# Altium PCB TLE5012_V1.2.PcbDoc
Units mil, origin at the board's own origin, x right, y up, seen from the top; angles counter-clockwise.
Board outline 878.69 x 787.25 mil, 2 copper layers (Top Layer, Bottom Layer); 10 components, 12 nets, 40 pads, 48 vias.
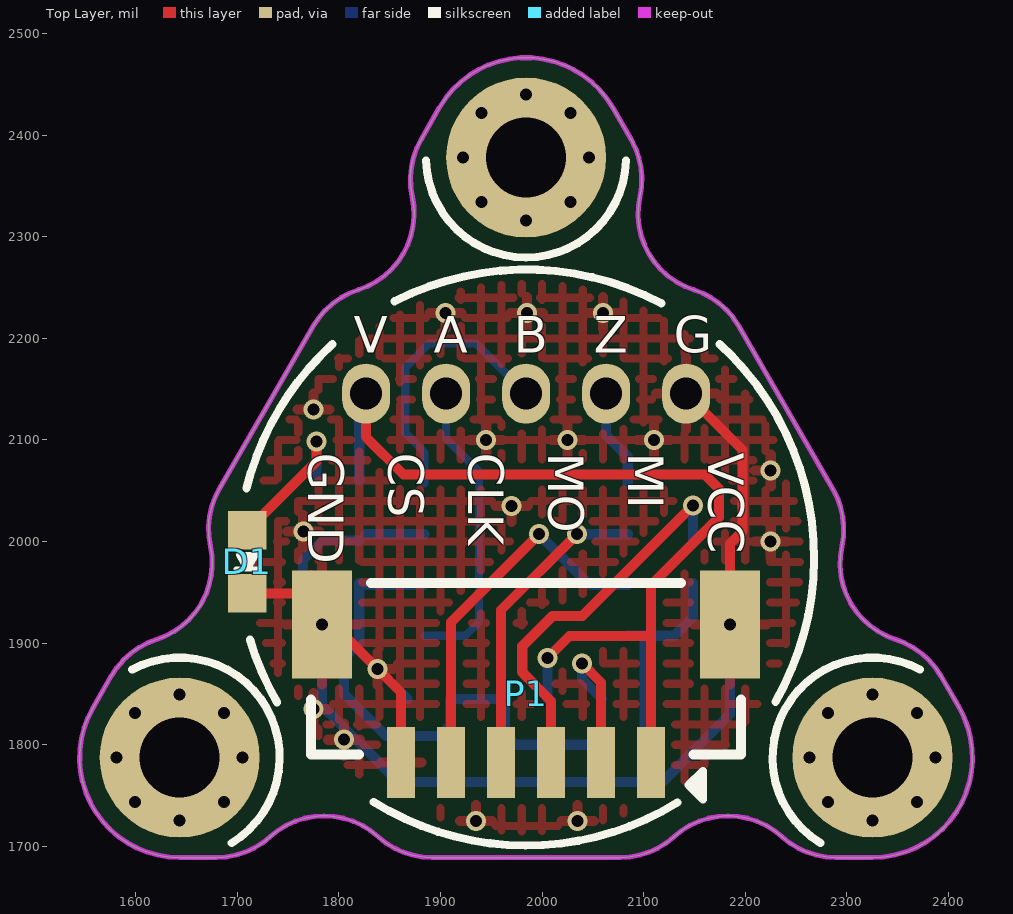
[diagram p0: Top Layer view]
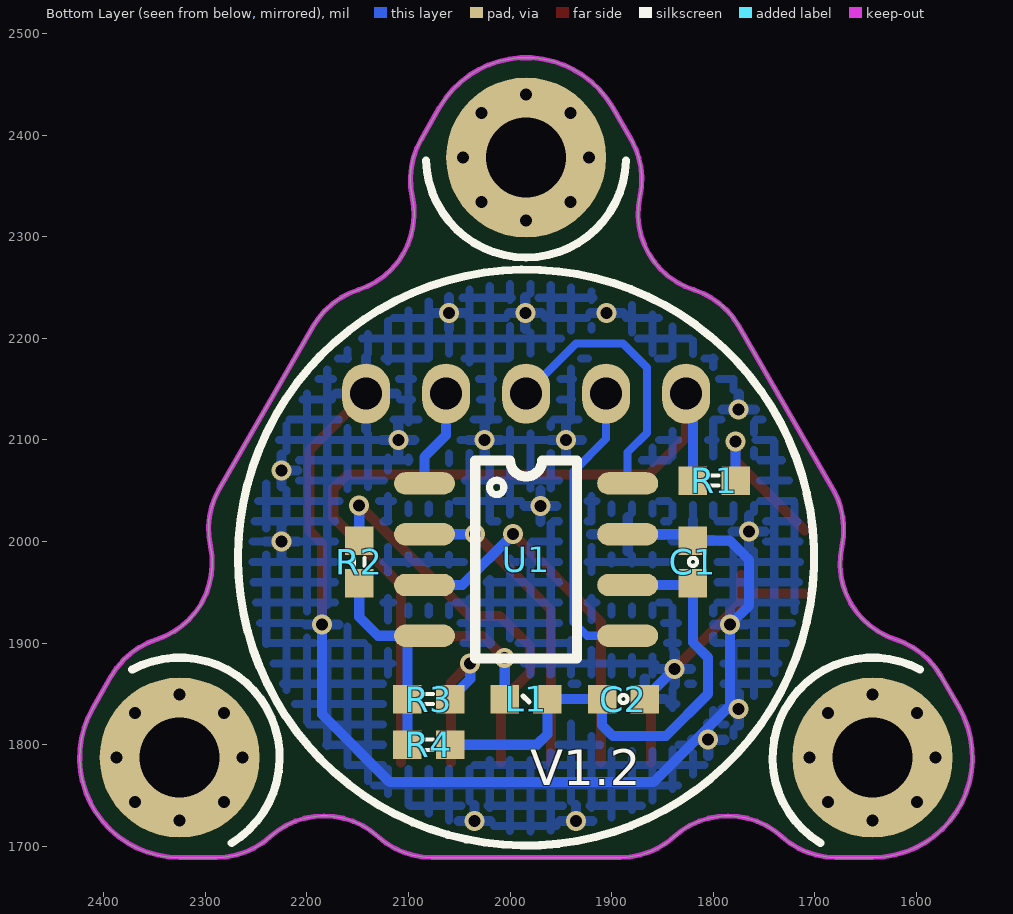
[diagram p1: Bottom Layer view, seen from below]

## Layer stack, top to bottom
Top Layer: signal copper 1.4
Dielectric: dielectric 12.6, FR-4, Dk 4.8
Bottom Layer: signal copper 1.4

## Board outline
1643.3,1688.98 1679.46,1688.98 ccw(c1679.46,1767.72) 1732.49,1709.51 cw(c1785.52,1651.3) 1838.55,1709.51 ccw(c1891.58,1767.72) 1891.58,1688.98 2076.93,1688.98 ccw(c2076.93,1767.72) 2129.96,1709.51 cw(c2182.99,1651.3) 2236.01,1709.51 ccw(c2289.04,1767.72) 2289.04,1688.98 2325.21,1688.98 ccw(c2325.21,1787.4) 2410.45,1836.61 2392.36,1867.94 ccw(c2324.17,1828.57) 2348.07,1903.59 cw(c2371.96,1978.62) 2295.04,1995.44 ccw(c2218.12,2012.26) 2286.31,2051.63 2193.63,2212.15 ccw(c2125.44,2172.78) 2149.33,2247.81 cw(c2173.23,2322.84) 2096.31,2339.66 ccw(c2019.38,2356.47) 2087.57,2395.85 2069.49,2427.17 ccw(c1984.25,2377.95) 1899.01,2427.17 1880.93,2395.85 ccw(c1949.12,2356.47) 1872.2,2339.66 cw(c1795.28,2322.84) 1819.17,2247.81 ccw(c1843.07,2172.78) 1774.88,2212.15 1682.2,2051.63 ccw(c1750.39,2012.26) 1673.47,1995.44 cw(c1596.54,1978.62) 1620.44,1903.59 ccw(c1644.33,1828.57) 1576.14,1867.94 1558.06,1836.61 ccw(c1643.3,1787.4)

## Design rules (kind name [scope] priority, off if disabled: settings)
Clearance [All] p1: gap=6
ComponentClearance [All] p1: gap=0 collisioncheckmode=3 verticalgap=0 showdistances=FALSE
PolygonConnect [All] p1: connectstyle=Relief reliefconductorwidth=10 reliefentries=4 polygonreliefangle="90 Angle"
RoutingVias [All] p1: holewidth=28 width=50 viastyle="Through Hole" minholewidth=7.87 minwidth=10.63 maxholewidth=382.33 maxwidth=404.33
SilkToSilkClearance [All] p1: silktosilkclearance=0
SilkscreenOverComponentPads [All] p1: minsilkscreentomaskgap=0
SolderMaskExpansion [All] p1: expansion=4
Width [All] p1: maxlimit=100 minlimit=6 preferedwidth=10
25 further rules are at their usual default settings.

## Components (designator, comment, footprint, x,y, rotation, side; value= is the part's Value field where it differs from the comment)
C1 "100nF/50V" 0402_C 1820,1980 r90 bottom locked
C2 "2.2uF" 0402_C 1888.51,1845 r180 bottom locked
D1 "0603_D-CL-0603 URC-RED" 0603_D 1710,1980 r90 top
L1 "1000R-350mA" 0402_L 1984.25,1845 r180 bottom locked
P1 "CON" BM06B-GHS-TBT(TOP) 1984.25,1850.39 r0 top locked
R1 "10K" 0402_R 1799,2060 r0 bottom
R2 "10R" 0402_R 2148.51,1980 r270 bottom locked
R3 "10R" 0402_R 2080,1845 r0 bottom locked
R4 "2.2K" 0402_R 2080,1800 r180 bottom
U1 "TLE5012" SOP-8 1984.25,1984.25 r270 bottom locked

## Footprints (in the part's own frame and the unit in brackets; to place one, negate y for a bottom-side part, rotate by r counter-clockwise, add the part's x,y. Pads: shape width x height; smd on the part's side, far side on the other; paste and mask are expansions set on the pad)
0402_C [mil]
  rect 28x28 smd: 1(-21,0) 2(21,0)
  silkscreen extent -4,-4 4,4
0402_L [mil]
  rect 28x28 smd: 1(-21,0) 2(21,0)
  silkscreen extent -3,-3 3,3
0402_R [mil]
  rect 28x28 smd: 1(-21,0) 2(21,0)
  silkscreen extent -4,-5 4,5
0603_D [mil]
  rect 38x38 smd: 1(31,0) 2(-31,0)
  silkscreen extent -7,-11 7,11
BM06B-GHS-TBT(TOP) [mm]
  rect 0.7x1.778 smd: 1(3.125,-1.725) 2(1.875,-1.725) 3(0.625,-1.725) 4(-0.625,-1.725) 5(-1.875,-1.725) 6(-3.125,-1.725)
  rect 1.5x2.7 smd: 7(-5.1,1.725) 8(5.1,1.725)
  silkscreen extent -5.37,-2.64 5.37,2.77
SOP-8 [mil]
  oval 22x60 smd: 1(-73,-100) 2(-23,-100) 3(27,-100) 4(77,-100) 5(77,100) 6(27,100) 7(-23,100) 8(-73,100)
  silkscreen extent -96,-50 100,50

## Part data
C1 C2: library part Cap, "Capacitor"
D1: library part LED, "LED"
L1: library part Inductor, "Inductor"
P1: library part CON-6
R1 R2 R3 R4: library part Res2, "Resistor"

## Free pads (board coordinates)
  oval 47.24x59.06 hole 31.5: 0(1826.77,2145.67)
  oval 47.24x59.05 hole 31.5: 0(1905.51,2145.67) 0(1984.25,2145.67) 0(2062.99,2145.67) 0(2141.73,2145.67)
  round 157.48 hole 78.74: 0(1984.25,2377.95) 1(2325.21,1787.4) 2(1643.3,1787.4)

## Via types
v1: diameter 19.68, hole 11.81, Top Layer to Bottom Layer, tented both sides, 48 vias

## Nets (pads, with @x,y where several pads share a name; then routed paths per layer and width w, separated by ;. In a path a pad name is that pad's centre, name@x,y a point inside that pad or via, vN(x,y) a via of type N, cw(c..) or ccw(c..) an arc to the next point about the centre after c; other vN are vias at no path point)
A: pad.0@1905.51,2145.67 U1.5 | length 297.5
  Bottom Layer w8: U1.5 1924.4,1907.25 1937.76,1920.62 1937.76,2068.9 1905.51,2101.14 pad.0@1905.51,2145.67
B: pad.0@1984.25,2145.67 U1.8 | length 270.8
  Bottom Layer w8: U1.8 1884.25,2087.9 1865.38,2106.77 1865.38,2171.33 1888.84,2194.79 1935.13,2194.79 pad.0@1984.25,2145.67
CS: P1.5 U1.3 | length 368.6
  Top Layer w10: P1.5 1910.43,1920.66 v1(1997.03,2007.25)
  Bottom Layer w10: v1(1997.03,2007.25) 2047.03,1957.25 U1.3
GND: C1.2 C2.2 D1.2 P1.6 P1.7 P1.8 pad.0@2141.73,2145.67 U1.7 | length 1402.3
  Top Layer w10: D1.2 1771.96,1949 P1.7@1772.43,1949.47 ; P1.7@1772.43,1967 1772.43,1940.2 v1(1837.95,1874.68) 1861.22,1851.41 P1.6 ; pad.0@2141.73,2145.67 2197.28,2090.12 2197.28,2010.34 2185.04,1998.09 v1(2185.04,1918.31)
  Bottom Layer w10: C1.2 1783.94,2001 1764.75,1981.81 1764.75,1937.02 v1(1783.47,1918.31) 1783.47,1838.54 1858.79,1763.22 2118.29,1763.22 2185.04,1829.96 v1(2185.04,1918.31) ; C1.2@1826.25,2007.25 U1.7 ; v1(1837.95,1874.68) 1867.51,1845.12 C2.2
  other v1: 1935,1725 2035,1725 1805,1805 1775,1835 2225,2000 1765,2010 1970,2035 2225,2070 1945,2100 2025,2100 2110,2100 1775,2130 1905,2225 1985,2225 2060,2225
MISO: P1.2 R3.1 | length 148.6
  Top Layer w10: v1(2039.28,1880.07) 2058.07,1861.28 P1.2
  Bottom Layer w10: v1(2039.28,1880.07) 2039.28,1864.72 R3.1
MOSI: P1.3 R2.1 | length 386.3
  Top Layer w10: P1.3 2008.86,1843.06 1980.45,1871.47 1980.45,1896.9 2010.42,1926.87 2039.77,1926.87 v1(2148.51,2035.61)
  Bottom Layer w10: R2.1 v1(2148.51,2035.61)
NetC1_1: C1.1 C2.1 L1.2 R4.2 U1.6 | length 517.7
  Bottom Layer w10: C1.1 1820,1900.66 1805.11,1885.77 1805.11,1850.06 1846.56,1808.6 1898.81,1808.6 1909.51,1819.3 C2.1 L1.2 1963.25,1810.39 1973.65,1800 R4.2 ; C1.1@1821.75,1957.25 U1.6
NetD1_1: D1.1 R1.1 | length 153.8
  Top Layer w10: D1.1 1778,2079 v1(1778,2098.34)
  Bottom Layer w10: R1.1 v1(1778,2098.34)
NetR2_2: R2.2 R3.2 R4.1 U1.4 | length 211.3
  Bottom Layer w10: U1.4 2130.01,1907.25 2148.51,1925.75 R2.2 ; R4.1 U1.4@2101,1906.15
SCK: P1.4 U1.2 | length 305.6
  Top Layer w10: P1.4 1959.65,1932.57 v1(2034.33,2007.25)
  Bottom Layer w10: v1(2034.33,2007.25) U1.2
VCC: L1.1 P1.1 pad.0@1826.77,2145.67 R1.2 | length 948.3
  Top Layer w10: pad.0@1826.77,2145.67 1826.77,2102.78 1863.53,2066.03 2160.07,2066.03 2174.13,2051.97 2174.13,2023.91 2107.28,1957.07 P1.1 ; v1(2005.25,1885.34) 2027.03,1907.12 2107.28,1907.12
  Bottom Layer w10: R1.2 1820,2138.9 pad.0@1826.77,2145.67 ; L1.1 v1(2005.25,1885.34)
Z: pad.0@2062.99,2145.67 U1.1 | length 97.2
  Bottom Layer w10: pad.0@2062.99,2145.67 2062.99,2104.64 2084.25,2083.38 U1.1
copper on no net:
  other v1: 1643.3,1725.36 2325.21,1725.36 1599.42,1743.53 1687.17,1743.53 2281.33,1743.53 2369.08,1743.53 1581.25,1787.4 1705.34,1787.4 2263.16,1787.4 2387.25,1787.4 1599.42,1831.28 1687.17,1831.28 2281.33,1831.28 2369.08,1831.28 1643.3,1849.45 2325.21,1849.45 1984.25,2315.91 1940.38,2334.08 2028.13,2334.08 1922.21,2377.95 2046.3,2377.95 1940.38,2421.83 2028.13,2421.83 1984.25,2440

## Polygon pours and split planes (outlines as drawn)
GND on Top Layer "Top Layer-No Net" (hatched 90Degree grid 20 track 8, remove dead copper, pour order 1000): 1499.78,1690.75 1497.09,1693.44 1497.09,2124 1497.09,2132.97 1863.96,2499.84 1867.55,2496.25 2118.7,2496.25 2128.57,2496.25 2445.21,2179.61 2458.67,2166.16 2458.67,1675.5 2458.67,1672.81 2436.24,1650.38 2429.96,1644.1 1552.7,1644.1 1546.42,1644.1 1499.78,1690.75
GND on Bottom Layer "Top Layer-No Net" (hatched 90Degree grid 20 track 8, remove dead copper, pour order 1001): 1499.78,1700.44 1497.09,1703.13 1497.09,2133.69 1497.09,2142.66 1863.96,2509.53 1867.55,2505.95 2118.7,2505.95 2128.57,2505.95 2445.21,2189.31 2458.67,2175.85 2458.67,1685.19 2458.67,1682.5 2436.24,1660.08 2429.96,1653.8 1552.7,1653.8 1546.42,1653.8 1499.78,1700.44

## Keep-outs
Keep-Out Layer:
  the board outline again, w5

## Silkscreen, mask and mechanical layers (free items; w line width, h text height)
Top Overlay:
  lines w8: 1596.38,1873.92 cw(c1643.3,1787.4) 1694.51,1703.35 ; 1709.11,2052.41 cw(c1984.25,1984.25) 1793.82,2194.22 ; 1712.5,1903.6 ccw(c1984.25,1984.25) 1739.26,1841.66 ; 1834.22,1743.75 ccw(c1984.25,1984.25) 2133.13,1743.03 ; 1854.89,2236.48 cw(c1984.25,1984.25) 2117.35,2234.53 ; 1885.87,2375.17 ccw(c1984.25,2377.95) 2082.64,2375.07 ; 2174.68,2194.22 cw(c1984.25,1984.25) 2229.63,1842.32 ; 2273.99,1703.35 cw(c2325.21,1787.4) 2372.13,1873.92
  text "V" at 1814.78,2185.9 h36
  text "A" at 1893.52,2185.9 h36
  text "B" at 1972.26,2185.9 h36
  text "Z" at 2051,2185.9 h36
  text "G" at 2129.74,2185.9 h36
  text "GND" at 1770,2087.27 h35 r270
  text "CS" at 1848.74,2087.27 h35 r270
  text "CLK" at 1927.48,2087.27 h35 r270
  text "MO" at 2006.22,2087.27 h35 r270
  text "MI" at 2084.96,2087.27 h35 r270
  text "VCC" at 2163.7,2087.27 h35 r270
Bottom Overlay:
  circle w8: c1984.25,1984.25 r283.46
  lines w8: 1596.38,1873.92 cw(c1643.3,1787.4) 1694.51,1703.35 ; 1885.87,2375.17 ccw(c1984.25,2377.95) 2082.64,2375.07 ; 2273.99,1703.35 cw(c2325.21,1787.4) 2372.13,1873.92
  text "V1.2" at 1980,1760 h35